# Altium PCB FaceElectrodesBus_v3.PcbDoc
Units mm, origin at the board's own origin, x right, y up, seen from the top; angles counter-clockwise.
Board outline 205.89 x 127.52 mm, 2 copper layers (Top Layer, Bottom Layer); 17 components, 23 nets, 76 pads, 2 vias.
Unrouted connection lines stored in the file: 1.
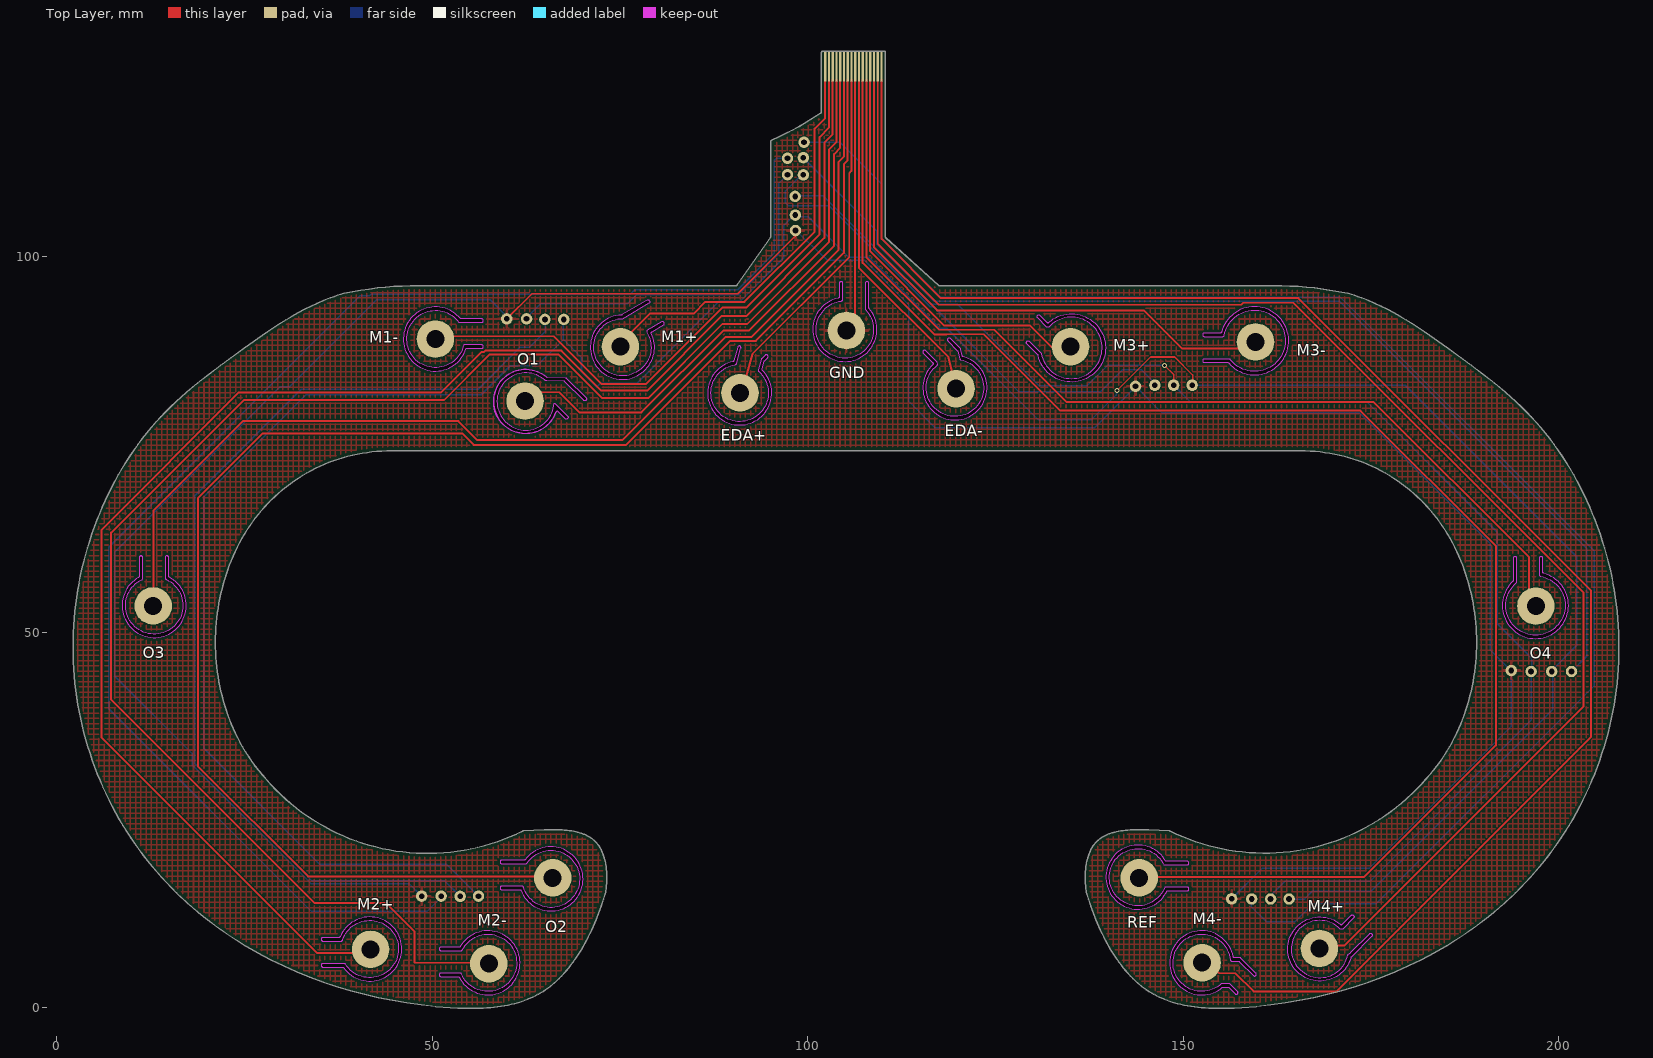
[diagram p0: Top Layer view]
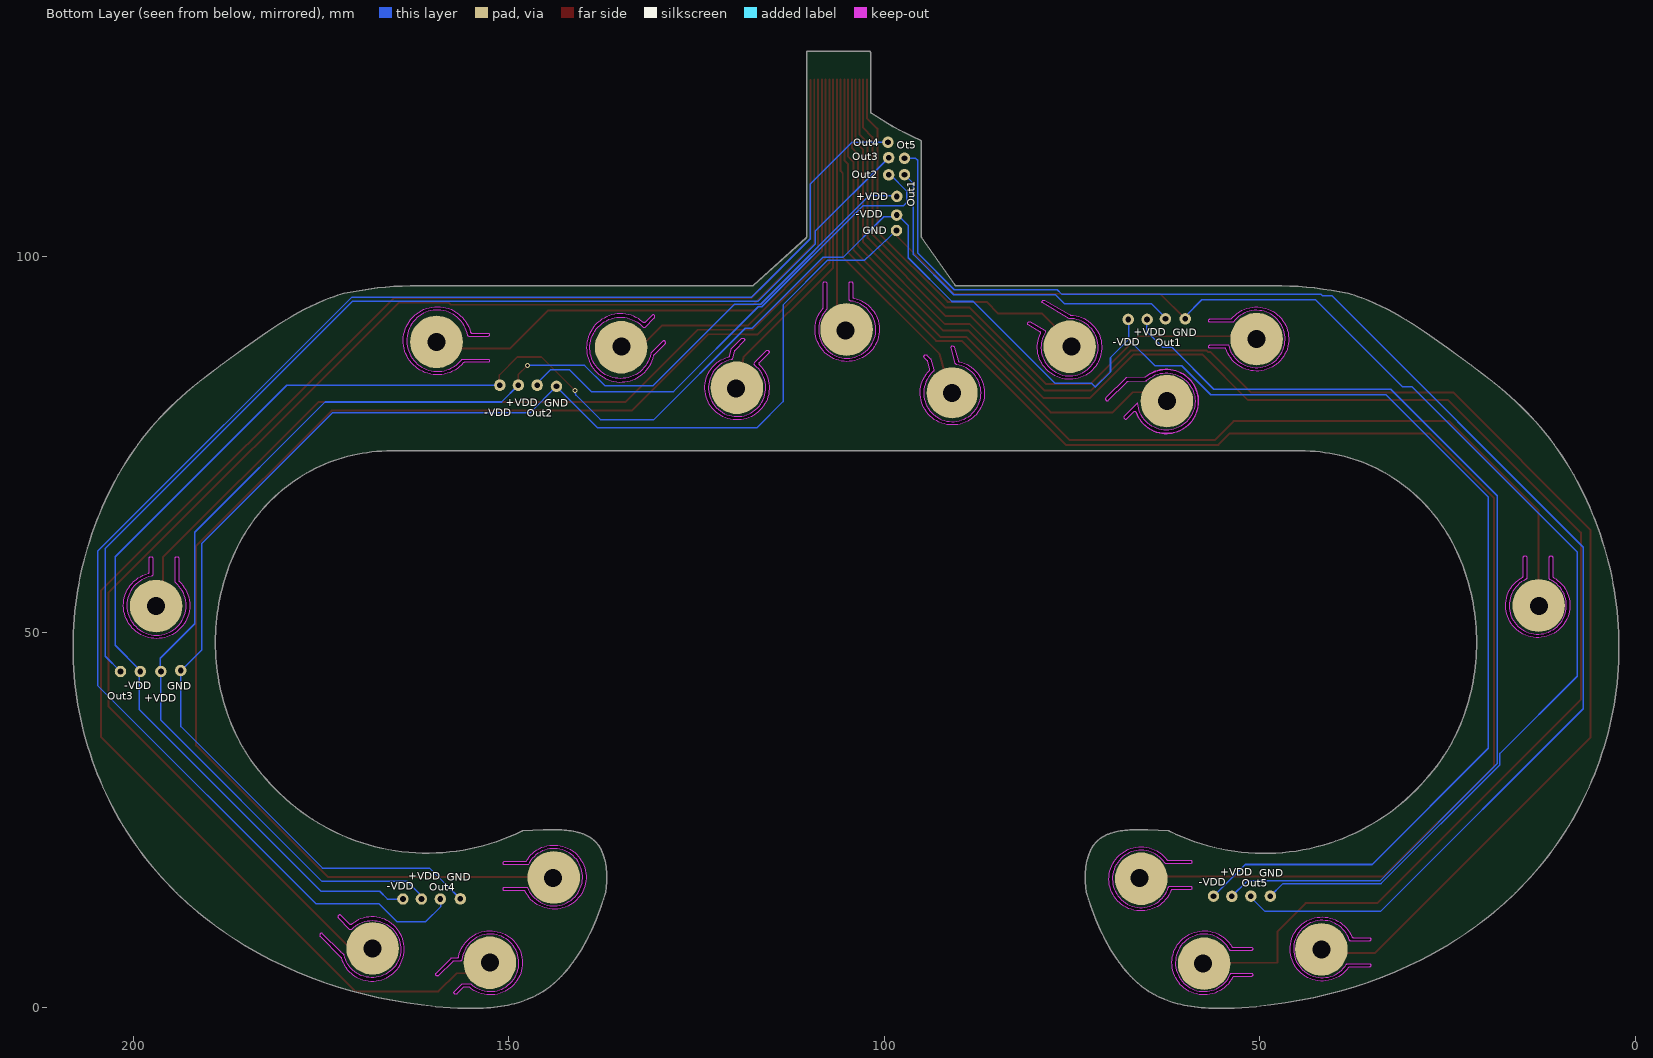
[diagram p1: Bottom Layer view, seen from below]

## Layer stack, top to bottom
Top Solder: solder mask 0.0102, Solder Resist, Dk 3.5
Top Layer: signal copper 0.0356
Dielectric 1: dielectric 0.32, FR-4, Dk 4.8
Bottom Layer: signal copper 0.0356
Bottom Solder: solder mask 0.0102, Solder Resist, Dk 3.5

## Board outline
3206 vertices, not listed, extent 2.153,-0.127 208.048,127.391
cut-out: 11.318,56.985 ccw(c11.232,57.165) 11.432,57.165 11.432,59.948 ccw(c11.232,59.948) 11.232,60.148 11.172,60.148 ccw(c11.172,59.948) 10.972,59.948 10.972,57.438 cw(c10.772,57.438) 10.871,57.264 ccw(c12.971,53.543) 14.997,57.306 cw(c15.091,57.482) 14.891,57.482 14.891,59.948 ccw(c14.691,59.948) 14.691,60.148 14.632,60.148 ccw(c14.632,59.948) 14.432,59.948 14.432,57.202 ccw(c14.632,57.202) 14.549,57.02 cw(c12.971,53.543)
cut-out: 35.215,5.596 ccw(c35.415,5.596) 35.415,5.396 38.035,5.396 cw(c38.035,5.196) 38.198,5.312 ccw(c41.678,7.79) 37.732,9.428 cw(c37.547,9.505) 37.547,9.305 35.415,9.305 ccw(c35.415,9.105) 35.215,9.105 35.215,9.05 ccw(c35.415,9.05) 35.415,8.85 37.863,8.85 ccw(c37.863,9.05) 38.052,8.988 cw(c41.678,7.79) 38.446,5.757 ccw(c38.277,5.65) 38.277,5.85 35.415,5.85 ccw(c35.415,5.65) 35.215,5.65
cut-out: 50.944,4.326 ccw(c51.144,4.326) 51.144,4.126 53.432,4.126 cw(c53.432,3.926) 53.61,4.016 ccw(c57.417,5.956) 53.741,8.133 cw(c53.569,8.235) 53.569,8.035 51.144,8.035 ccw(c51.144,7.835) 50.944,7.835 50.944,7.78 ccw(c51.144,7.78) 51.144,7.58 53.838,7.58 ccw(c53.838,7.78) 54.016,7.689 cw(c57.417,5.956) 53.905,4.459 ccw(c53.721,4.38) 53.721,4.58 51.144,4.58 ccw(c51.144,4.38) 50.944,4.38
cut-out: 59.035,15.908 ccw(c59.235,15.908) 59.235,15.708 61.638,15.708 cw(c61.638,15.508) 61.824,15.581 ccw(c65.804,17.134) 62.386,19.698 cw(c62.226,19.818) 62.226,19.618 59.235,19.618 ccw(c59.235,19.418) 59.035,19.418 59.035,19.363 ccw(c59.235,19.363) 59.235,19.163 62.461,19.163 ccw(c62.461,19.363) 62.627,19.252 cw(c65.804,17.134) 62.152,16.021 ccw(c61.961,15.963) 61.961,16.163 59.235,16.163 ccw(c59.235,15.963) 59.035,15.963
cut-out: 171.939,6.99 cw(c172.141,6.946) 172.021,7.114 172.318,7.328 cw(c172.322,7.323) 172.318,7.328 ccw(c172.205,7.485) 172.342,7.348 ccw(c172.205,7.485) 172.342,7.348 174.822,9.828 cw(c174.968,9.682) 175.114,9.828 175.153,9.789 cw(c175.006,9.643) 175.213,9.643 cw(c175.006,9.643) 175.153,9.497 172.386,6.73 ccw(c172.523,6.594) 172.337,6.646 cw(c168.213,7.79) 170.944,11.085 ccw(c171.068,11.234) 171.204,11.097 172.379,12.271 cw(c172.525,12.125) 172.671,12.271 cw(c172.666,12.266) 172.671,12.271 172.71,12.232 cw(c172.564,12.086) 172.77,12.086 cw(c172.564,12.086) 172.71,11.94 171.228,10.458 cw(c171.081,10.604) 170.934,10.459 ccw(c168.213,7.79)
cut-out: 155.219,2.682 cw(c155.348,2.529) 155.348,2.729 155.93,2.729 cw(c155.93,2.529) 156.072,2.67 156.929,1.813 ccw(c157.07,1.954) 157.212,1.813 157.25,1.851 ccw(c157.109,1.993) 157.25,2.134 156.26,3.125 ccw(c156.119,2.983) 156.119,3.183 155.177,3.183 ccw(c155.177,2.983) 155.043,3.131 cw(c152.473,5.956) 156.27,6.362 ccw(c156.469,6.383) 156.469,6.183 157.361,6.183 cw(c157.361,5.983) 157.503,6.125 159.372,4.256 ccw(c159.513,4.397) 159.655,4.256 159.693,4.294 ccw(c159.552,4.436) 159.693,4.577 157.691,6.58 ccw(c157.55,6.438) 157.55,6.638 156.858,6.638 cw(c156.858,6.838) 156.662,6.799 ccw(c152.473,5.956)
cut-out: 147.555,16.01 cw(c143.985,17.363) 147.429,19.01 150.558,19.01 ccw(c150.558,19.21) 150.758,19.21 150.758,19.265 ccw(c150.558,19.265) 150.558,19.465 147.705,19.465 ccw(c143.985,17.363) 147.857,15.556 150.558,15.556 ccw(c150.558,15.756) 150.758,15.756 150.758,15.81 ccw(c150.558,15.81) 150.558,16.01
cut-out: 194.368,56.562 ccw(c194.239,56.715) 194.439,56.715 194.439,59.855 ccw(c194.239,59.855) 194.239,60.055 194.184,60.055 ccw(c194.184,59.855) 193.984,59.855 193.984,56.919 cw(c193.784,56.919) 193.92,56.773 ccw(c196.92,53.543) 198.043,57.805 cw(c198.094,57.999) 197.894,57.999 197.894,59.855 ccw(c197.694,59.855) 197.694,60.055 197.639,60.055 ccw(c197.639,59.855) 197.439,59.855 197.439,57.633 ccw(c197.639,57.633) 197.604,57.436 cw(c196.92,53.543)
cut-out: 129.184,88.41 cw(c129.325,88.551) 129.14,88.628 129.163,88.683 cw(c129.348,88.606) 129.489,88.747 131.057,87.18 cw(c130.916,87.038) 131.112,87.076 ccw(c135.126,87.848) 132.137,90.635 cw(c131.99,90.772) 131.849,90.63 130.615,91.865 cw(c130.756,92.006) 130.571,92.083 130.594,92.137 cw(c130.779,92.061) 130.92,92.202 131.854,91.268 ccw(c131.995,91.41) 132.127,91.26 cw(c135.126,87.848) 130.693,86.856 ccw(c130.498,86.812) 130.64,86.954
cut-out: 152.591,86.114 ccw(c152.791,86.114) 152.791,85.914 155.919,85.914 cw(c155.919,85.714) 156.07,85.844 ccw(c159.514,88.805) 155.125,89.972 cw(c154.932,90.023) 154.932,89.823 152.791,89.823 ccw(c152.791,89.623) 152.591,89.623 152.591,89.568 ccw(c152.791,89.568) 152.791,89.368 155.296,89.368 ccw(c155.296,89.568) 155.493,89.533 cw(c159.514,88.805) 156.291,86.291 ccw(c156.134,86.168) 156.134,86.368 152.791,86.368 ccw(c152.791,86.168) 152.591,86.168
cut-out: 117.309,85.729 117.272,85.886 ccw(c117.077,85.84) 117.219,85.981 115.712,87.488 ccw(c115.57,87.347) 115.429,87.488 115.39,87.449 ccw(c115.532,87.308) 115.39,87.166 116.655,85.902 cw(c116.514,85.76) 116.652,85.616 ccw(c119.612,82.534) 120.747,86.654 cw(c120.8,86.846) 120.606,86.8 120.406,87.637 ccw(c120.212,87.591) 120.353,87.733 118.978,89.107 ccw(c118.837,88.966) 118.696,89.107 118.657,89.068 ccw(c118.798,88.927) 118.657,88.786 119.94,87.502 cw(c119.799,87.361) 119.994,87.407 120.228,86.423 ccw(c120.422,86.47) 120.382,86.274 cw(c119.612,82.534) 117.239,85.526 ccw(c117.115,85.682)
cut-out: 104.497,94.094 ccw(c104.474,94.293) 104.674,94.293 104.674,96.467 ccw(c104.474,96.467) 104.474,96.667 104.414,96.667 ccw(c104.414,96.467) 104.214,96.467 104.214,94.678 cw(c104.014,94.678) 104.056,94.482 ccw(c104.945,90.303) 108.182,93.092 cw(c108.333,93.223) 108.133,93.223 108.133,96.467 ccw(c107.933,96.467) 107.933,96.667 107.874,96.667 ccw(c107.874,96.467) 107.674,96.467 107.674,93.054 ccw(c107.874,93.054) 107.728,92.917 cw(c104.945,90.303)
cut-out: 90.376,85.632 ccw(c90.346,85.83) 90.539,85.777 91.116,87.855 91.123,87.875 91.034,88.093 ccw(c90.922,87.835) 90.665,87.946 90.171,86.171 cw(c89.979,86.225) 90.022,86.03 ccw(c90.937,81.856) 93.978,84.857 cw(c94.12,84.997) 93.928,85.051 94.213,86.078 cw(c94.406,86.024) 94.264,86.166 94.668,86.569 ccw(c94.526,86.71) 94.645,86.871 ccw(c94.483,86.733) 94.336,86.887 93.854,86.405 ccw(c93.995,86.264) 93.803,86.317 93.413,84.913 ccw(c93.605,84.86) 93.472,84.71 cw(c90.937,81.856)
cut-out: 75.371,91.753 78.923,93.831 ccw(c78.864,94.005) 78.985,93.867 ccw(c78.828,93.945) 79.003,93.934 ccw(c78.867,93.971) 78.982,94.052 78.928,94.145 ccw(c78.766,94.031) 78.651,94.193 75.25,92.245 cw(c75.154,92.411) 75.161,92.219 ccw(c75.323,87.942) 79.457,86.835 ccw(c75.324,87.943) 79.191,89.774 cw(c79.366,89.857) 79.269,90.024 80.813,90.915 ccw(c80.709,91.094) 80.909,91.041 ccw(c80.71,91.094) 80.888,91.198 80.858,91.249 ccw(c80.679,91.146) 80.576,91.325 78.65,90.213 ccw(c78.754,90.034) 78.577,89.927 cw(c75.324,87.943) 79.005,86.956 cw(c75.323,87.943)
cut-out: 54.164,88.248 cw(c50.427,89.033) 53.537,91.248 56.595,91.248 ccw(c56.595,91.448) 56.795,91.448 56.795,91.508 ccw(c56.595,91.508) 56.595,91.708 53.76,91.708 53.76,91.707 ccw(c50.427,89.033) 54.515,87.788 56.595,87.788 ccw(c56.595,87.988) 56.795,87.988 56.795,88.048 ccw(c56.595,88.048) 56.595,88.248
cut-out: 66.243,80.469 66.318,80.468 68.041,78.745 cw(c67.9,78.603) 68.041,78.462 67.999,78.42 cw(c67.858,78.561) 67.717,78.42 66.785,79.351 ccw(c66.644,79.21) 66.456,79.277 cw(c62.433,80.717) 65.189,83.982 65.188,83.982 ccw(c65.317,84.135) 65.314,83.935 67.71,83.889 cw(c67.707,83.69) 67.848,83.831 70.488,81.191 cw(c70.346,81.05) 70.488,80.908 70.446,80.866 cw(c70.304,81.008) 70.163,80.866 67.654,83.375 ccw(c67.513,83.234) 67.516,83.433 65.242,83.477 65.15,83.477 cw(c65.15,83.677) 65.015,83.529 ccw(c62.433,80.717)
cut-out: 66.462,79.275 cw(c62.433,80.717) 65.193,83.987 cw(c65.189,83.982) 65.195,83.982 cw(c65.189,83.982) 65.184,83.977 ccw(c62.433,80.717) 66.449,79.279 cw(c66.456,79.277) 66.462,79.277 cw(c66.456,79.277)

## Design rules (kind name [scope] priority, off if disabled: settings)
BoardOutlineClearance [All] p1: gap=0.381
Clearance [All] p1: gap=0.152
ComponentClearance [All] p1: gap=0.025 collisioncheckmode=3 verticalgap=0.025 showdistances=FALSE
DiffPairsRouting [All] p1: maxlimit=10 minlimit=0.152 mostfreqgap=0.203 toplayer_minwidth=0.152 toplayer_maxwidth=0.381 toplayer_prefwidth=0.203 bottomlayer_minwidth=0.152 bottomlayer_maxwidth=0.381 bottomlayer_prefwidth=0.203 maxuncoupledlength=12.7
HoleSize [All] p1: absolutevalues=TRUE maxlimit=6.731 minlimit=0.33 maxpercent=80.000 minpercent=20.000
HoleToHoleClearance [All] p1: gap=0.254 allowstackedmicrovias=FALSE
MinimumAnnularRing [All] p1: minimumring=0.178
MinimumSolderMaskSliver [All] p1: minsoldermaskwidth=0
PlaneClearance [All] p1: clearance=0.254
PlaneConnect [All] p1: planeconnectstyle=Direct reliefexpansion=0.406 reliefentries=4 reliefconductorwidth=0.152 reliefairgap=0.152
PolygonConnect PolygonConnect_1 [All vs IsNamedPolygon('GND_L01_P005')] p1: connectstyle=Relief reliefconductorwidth=0.354 reliefentries=4 polygonreliefangle="90 Angle" airgapwidth=0.354
PolygonConnect [All] p2: connectstyle=Relief reliefconductorwidth=0.203 reliefentries=4 polygonreliefangle="90 Angle" airgapwidth=0.152
RoutingCorners [All] p1: cornerstyle=45-Degree minsetback=1.25 maxsetback=1.25
RoutingVias [All] p1: holewidth=0.381 width=0.762 viastyle="Through Hole" minholewidth=0.33 minwidth=0.686 maxholewidth=2.54 maxwidth=2.896
SilkToSilkClearance [All] p1: silktosilkclearance=0
SilkToSolderMaskClearance [IsPad] p1: minsilkscreentomaskgap=0.152 clearancetoexposedcopper=TRUE
SolderMaskExpansion [All] p1: expansion=0.075
Width [All] p1: maxlimit=10.16 minlimit=0.152 preferedwidth=0.203
20 further rules are at their usual default settings.

## Classes and differential pairs
component class FaceElectrodesBus: EDA+ EDA- GND M1+ M1- M2+ M2- M3+ M3- M4+ M4- O1 O2 O3 O4 REF

## Components (designator, comment, footprint, x,y, rotation, side; value= is the part's Value field where it differs from the comment)
EDA+ "Test point small" "Test point small" 90.983,81.864 r90 top
EDA- "Test point small" "Test point small" 119.761,82.423 r90 top
GND "Test point small" "Test point small" 105.156,90.17 r90 top
M1+ "M1+" "Test point small" 75.057,88.011 r90 top
M1- "Test point small" "Test point small" 50.419,89.027 r90 top
M2+ "Test point small" "Test point small" 41.783,7.747 r90 top
M2- "Test point small" "Test point small" 57.531,5.842 r90 top
M3+ "Test point small" "Test point small" 135.001,88.011 r90 top
M3- "Test point small" "Test point small" 159.639,88.646 r90 top
M4+ "Test point small" "Test point small" 168.148,7.874 r90 top
M4- "Test point small" "Test point small" 152.527,5.969 r90 top
O1 "Test point small" "Test point small" 62.357,80.772 r0 top
O2 "Test point small" "Test point small" 66.04,17.272 r0 top
O3 "Test point small" "Test point small" 12.827,53.492 r0 top
O4 "Test point small" "Test point small" 196.977,53.467 r0 top
REF "Test point small" "Test point small" 144.145,17.272 r90 top
? "Comment" "16 PIN 0.5mm" 106.428,137.851 r0 top

## Footprints (in the part's own frame and the unit in brackets; to place one, negate y for a bottom-side part, rotate by r counter-clockwise, add the part's x,y. Pads: shape width x height; smd on the part's side, far side on the other; paste and mask are expansions set on the pad)
"16 PIN 0.5mm" [mm]
  rect 0.3x4 smd mask+0.06: 1(-4.099,-12.527) 2(-3.599,-12.527) 3(-3.099,-12.527) 4(-2.599,-12.527) 5(-2.099,-12.527) 6(-1.599,-12.527) 7(-1.099,-12.527) 8(-0.599,-12.527) 9(-0.099,-12.527) 10(0.401,-12.527) 11(0.901,-12.527) 12(1.401,-12.527) 13(1.901,-12.527) 14(2.401,-12.527) 15(2.901,-12.527) 16(3.401,-12.527)
"Test point small" [mm]
  round 5 hole 2.4: 0(0,0)

## Part data
M1+: library part "Test point small"

## Free pads (board coordinates)
  round 7 smd far side: 0(12.852,53.543) 0(41.783,7.747) 0(50.419,89.027) 0(57.404,5.842) 0(62.357,80.772) 0(65.786,17.145) 0(75.311,88.011) 0(105.029,90.297) 0(119.634,82.55) 0(135.052,87.935) 0(144.018,17.323) 0(152.527,5.969) 0(159.639,88.646) 0(168.148,7.874) 0(196.977,53.467)
  round 6.8 smd far side: 0(90.957,81.864)
  round 1.524 hole 0.762: 1(48.59,14.834) 1(59.919,91.719) 1(143.662,82.728) 1(156.464,14.478) 1(193.7,44.882) 2(51.181,14.834) 2(62.56,91.719) 2(98.374,103.48) 2(146.228,82.88) 2(159.131,14.453) 2(201.727,44.755) 3(53.721,14.808) 3(64.999,91.643) 3(98.349,105.537) 3(148.742,82.88) 3(161.646,14.453) 3(196.342,44.755) 4(56.159,14.834) 4(67.513,91.643) 4(151.206,82.88) 4(164.109,14.453) 4(199.085,44.755) 5(98.323,108.026) 6(99.517,115.24) 7(99.416,113.182) 8(99.416,110.896) 9(97.307,110.922) 10(97.307,113.106)

## Via types
v1: diameter 0.7, hole 0.4, Top Layer to Bottom Layer, 2 vias

## Nets (pads, with @x,y where several pads share a name; then routed paths per layer and width w, separated by ;. In a path a pad name is that pad's centre, name@x,y a point inside that pad or via, vN(x,y) a via of type N, cw(c..) or ccw(c..) an arc to the next point about the centre after c; other vN are vias at no path point)
+VDD: pad.3@53.721,14.808 pad.3@64.999,91.643 pad.3@148.742,82.88 pad.3@161.646,14.453 pad.3@196.342,44.755 pad.5 | length 322.8
  Top Layer w0.203: v1(147.523,85.522) 148.742,84.303 pad.3@148.742,82.88
  Bottom Layer w0.203: pad.3@53.721,14.808 51.664,16.866 33.985,16.866 18.364,32.487 18.364,68.148 32.563,82.347 56.109,82.347 61.697,87.935 62.967,87.935 65.049,90.018 65.049,91.338 64.999,91.643 pad.3@65.176,91.796 ; pad.5@98.247,107.798 98.552,108.102 102.032,108.102 116.459,93.675 119.939,93.675 130.801,82.813 137.209,82.813 139.918,85.522 v1(147.523,85.522) ; pad.3@148.742,82.88 150.978,80.645 174.473,80.645 191.821,63.297 191.821,51.105 196.418,46.507 pad.3@196.418,44.729 ; pad.3@161.493,14.757 163.525,16.789 174.879,16.789 196.342,38.252 pad.3@196.342,44.755
-VDD: pad.3@98.349,105.537 pad.4 | length 381.9
  Top Layer w0.203: v1(141.199,82.169) 145.669,86.639 148.869,86.639 151.257,84.252 pad.4@151.257,83.007
  Bottom Layer w0.203: pad.4@56.159,14.834 51.943,19.05 35.027,19.05 19.558,34.519 19.558,67.996 33.172,81.61 56.51,81.61 60.379,85.48 63.966,85.48 67.462,88.976 ; pad.4@67.462,91.567 67.462,88.976 ; pad.3@98.247,105.588 96.799,104.14 96.799,99.847 90.983,94.031 88.155,94.031 77.295,83.17 72.451,83.17 71.907,82.626 69.875,84.658 69.875,86.563 67.462,88.976 ; pad.3@98.349,105.537 98.663,105.318 100.066,105.318 105.486,99.898 108.204,99.898 117.627,90.475 118.516,90.475 130.683,78.308 137.806,78.308 141.072,81.574 v1(141.199,82.169) ; pad.4@151.206,82.88 179.578,82.88 202.413,60.046 202.413,48.235 pad.4@199.212,45.034 ; pad.4@164.109,14.453 166.167,14.453 167.208,15.494 175.031,15.494 199.212,39.675 199.212,44.907 pad.4@199.187,44.958
EDA+: EDA+.0 pad.0@90.957,81.864 | length 47.5
  Top Layer w0.254: EDA+.0@91.059,81.788 91.177,81.821 92.626,87.038 105.537,99.949 105.537,111.125 105.823,111.411 105.823,123.571
EDA-: EDA-.0 pad.0@119.634,82.55 | length 46.2
  Top Layer w0.254: 106.823,123.571 106.823,98.536 118.769,86.59 EDA-.0
GND: GND.0 pad.0@105.029,90.297 pad.1 pad.2@98.374,103.48 | length 409.7
  Top Layer w0.203: pad.1@59.919,91.719 63.271,95.072 90.678,95.072 98.323,102.718 pad.2@98.323,103.632
  Top Layer w0.254: GND.0 104.902,90.17 106.323,91.591 106.323,123.571
  Bottom Layer w0.203: pad.1@48.59,14.834 46.914,16.51 33.838,16.51 18.009,32.339 18.009,33.833 7.722,44.12 7.722,60.655 29.769,82.702 31.013,82.702 42.57,94.259 57.709,94.259 pad.1@59.969,91.999 ; pad.2@98.374,103.48 102.591,99.543 107.518,99.543 113.487,93.574 113.487,80.696 116.967,77.216 138.201,77.216 pad.1@143.688,82.702 ; pad.1@143.713,82.728 pad.1@143.688,82.702 ; pad.1@156.464,14.478 160.553,18.567 174.828,18.567 193.675,37.414 pad.1@193.675,44.882 ; pad.1@193.624,44.882 190.932,47.574 190.932,61.773 173.507,79.197 147.193,79.197 pad.1@143.688,82.702
M1+: M1+.0 pad.0@75.311,88.011 | length 53.7
  Top Layer w0.254: M1+.0@75.438,87.503 75.438,88.9 78.969,92.431 84.836,92.431 86.385,93.98 91.567,93.98 100.914,103.327 100.914,117.043 102.323,118.452 102.323,123.571
M1-: M1-.0 pad.0@50.419,89.027 | length 83.5
  Top Layer w0.254: M1-.0@50.546,88.138 51.816,89.408 66.167,89.408 72.517,83.058 78.486,83.058 88.646,93.218 91.821,93.218 101.575,102.972 101.575,115.926 102.823,117.174 102.823,123.571
M2+: M2+.0 pad.0@41.783,7.747 | length 213.3
  Top Layer w0.254: M2+.0@41.402,7.239 34.671,7.239 5.969,35.941 5.969,63.627 24.257,81.915 51.181,81.915 56.546,87.28 56.888,87.28 57.086,87.478 67.208,87.478 72.517,82.169 78.613,82.169 88.519,92.075 91.821,92.075 102.235,102.489 102.235,115.189 103.323,116.277 103.323,123.571
M2-: M2-.0 pad.0@57.404,5.842 | length 228.1
  Top Layer w0.254: M2-.0@57.658,5.969 47.625,5.969 47.625,10.16 43.883,13.902 34.358,13.902 7.239,41.021 7.239,63.246 24.892,80.899 51.562,80.899 57.658,86.995 66.802,86.995 72.644,81.153 78.74,81.153 88.621,91.034 91.923,91.034 102.845,101.956 102.845,114.275 103.823,115.253 103.823,123.571
M3+: M3+.0 pad.0@135.052,87.935 | length 54.2
  Top Layer w0.254: 108.323,123.571 108.323,100.719 118.212,90.83 129.642,90.83 M3+.0@133.858,86.614
M3-: M3-.0 pad.0@159.639,88.646 | length 78
  Top Layer w0.254: 108.823,123.571 108.839,123.555 108.839,101.219 117.221,92.837 144.78,92.837 149.86,87.757 M3-.0@158.877,87.757
M4-: M4-.0 pad.0@152.527,5.969 | length 223.6
  Top Layer w0.254: 109.855,123.539 109.855,102.362 117.729,94.488 165.354,94.488 204.343,55.499 204.343,36.068 170.434,2.159 159.385,2.159 156.972,4.572 154.813,4.572 M4-.0@151.638,7.747
Net*_15: M4+.0 pad.0@168.148,7.874 | length 199.9
  Top Layer w0.254: 109.323,123.571 109.323,101.751 117.475,93.599 157.746,93.599 158.007,93.86 164.69,93.86 203.327,55.223 203.327,40.132 171.45,8.255 M4+.0@167.005,8.255
O1: O1.0 pad.0@62.357,80.772 | length 73.6
  Top Layer w0.254: O1.0@62.775,81.66 63.132,81.997 66.96,81.884 69.596,79.248 77.851,79.248 88.748,90.145 92.177,90.145 103.505,101.473 103.505,113.665 104.323,114.483 104.323,123.571
O2: O2.0 pad.0@65.786,17.145 | length 213
  Top Layer w0.254: O2.0@65.786,17.145 65.456,17.475 33.452,17.475 18.796,32.131 18.796,67.818 27.432,76.454 53.975,76.454 55.499,74.93 75.819,74.93 89.662,88.773 93.091,88.773 104.826,100.508 104.826,112.319 105.323,112.816 105.323,123.571
O3: O3.0 pad.0@12.852,53.543 | length 143.5
  Top Layer w0.254: O3.0@12.929,53.365 12.929,53.492 12.878,53.543 12.878,57.711 12.852,57.736 12.852,66.192 24.765,78.105 53.467,78.105 56.007,75.565 75.311,75.565 89.027,89.281 92.456,89.281 104.115,100.94 104.115,112.624 104.823,113.332 104.823,123.571
O4: O4.0 pad.0@196.977,53.467 | length 135.6
  Top Layer w0.254: 107.823,123.571 107.823,99.949 117.5,90.272 124.866,90.272 134.493,80.645 175.387,80.645 196.088,59.944 O4.0@196.088,52.832
Output1: pad.2@62.56,91.719 pad.9 | length 48.4
  Bottom Layer w0.203: pad.2@62.484,91.796 pad.2@62.56,91.872 ; pad.2@62.56,91.719 pad.2@62.56,91.872 ; pad.9 96.114,109.728 96.114,100.279 90.754,94.92 77.191,94.92 76.022,93.751 64.44,93.751 pad.2@62.56,91.872
Output2: pad.2@146.228,82.88 pad.8 | length 66.5
  Bottom Layer w0.203: pad.8 99.162,110.896 97.028,108.763 97.028,107.188 97.434,106.782 102.85,106.782 116.312,93.32 116.789,93.32 128.067,82.042 139.014,82.042 141.884,84.912 144.501,84.912 pad.2@146.329,83.083
Output3: pad.2@201.727,44.755 pad.7 | length 144.2
  Bottom Layer w0.203: pad.7 109.195,103.403 109.195,101.676 116.789,94.082 170.79,94.082 203.784,61.087 ; pad.2@201.727,44.755 203.759,46.787 203.759,61.087 203.733,61.112
Output4: pad.2@159.131,14.453 pad.6 | length 210.7
  Bottom Layer w0.203: pad.6 104.267,115.265 109.849,109.683 109.849,102.394 116.596,95.648 116.62,95.648 117.642,94.625 170.906,94.625 204.775,60.757 204.775,42.901 175.666,13.792 167.259,13.792 164.922,11.455 161.061,11.455 159.055,13.462 pad.2@159.055,14.605
Output5: pad.2@51.181,14.834 pad.10 | length 196.8
  Bottom Layer w0.203: pad.2@51.156,14.656 49.352,12.852 33.858,12.852 6.909,39.802 6.909,61.316 40.411,94.818 41.681,94.818 41.885,95.021 76.388,95.021 76.972,95.606 90.688,95.606 95.558,100.476 95.558,112.827 95.837,113.106 pad.10
REF: pad.0@144.018,17.323 REF.0 | length 203.9
  Top Layer w0.254: 107.323,123.571 107.323,99.179 116.865,89.637 118.507,89.637 118.544,89.674 123.432,89.674 133.604,79.502 173.609,79.502 191.643,61.468 191.643,34.925 174.117,17.399 REF.0@145.923,17.399
pads on no net: ?.1 ?.2 ?.3 ?.4 ?.5 ?.6 ?.7 ?.8 ?.9 ?.10 ?.11 ?.12 ?.13 ?.14 ?.15 ?.16

## Polygon pours and split planes (outlines as drawn)
GND on Top Layer "GND_L01_P005" (hatched 90Degree grid 0.7 track 0.203, pour order 5): 3206 vertices, not listed, extent 2.153,-0.127 208.048,127.391

## Silkscreen, mask and mechanical layers (free items; w line width, h text height)
Bottom Overlay:
  text "Out4" at 104.165,114.732 h1
  text "Ot5" at 98.374,114.351 h1
  text "Out3" at 104.242,112.852 h1
  text "Out2" at 104.343,110.465 h1
  text "+VDD" at 103.708,107.544 h1
  text "Out1" at 95.936,106.68 h1 r270
  text "-VDD" at 103.81,105.156 h1
  text "GND" at 102.895,102.997 h1
  text "+VDD" at 66.777,89.484 h1
  text "GND" at 61.595,89.408 h1
  text "-VDD" at 69.596,88.163 h1
  text "Out1" at 63.932,88.062 h1
  text "+VDD" at 150.444,80.086 h1
  text "GND" at 145.263,80.01 h1
  text "-VDD" at 153.264,78.765 h1
  text "Out2" at 147.599,78.664 h1
  text "-VDD" at 201.244,42.393 h1
  text "GND" at 195.529,42.316 h1
  text "Out3" at 203.505,40.996 h1
  text "+VDD" at 198.552,40.716 h1
  text "+VDD" at 55.27,17.526 h1
  text "GND" at 50.089,17.45 h1
  text "+VDD" at 163.424,16.993 h1
  text "GND" at 158.242,16.916 h1
  text "-VDD" at 58.09,16.205 h1
  text "Out5" at 52.426,16.104 h1
  text "-VDD" at 166.243,15.672 h1
  text "Out4" at 160.579,15.57 h1
Mechanical 2:
  drawing of 1051 lines, arcs and shapes, not listed
Mechanical 4:
  lines w0.013: 92.715,125.186 ccw(c92.718,125.186) 92.722,125.186 ccw(c92.718,125.186) 92.715,125.186